# Altium PCB pcb_LAB_GNDpour.PcbDoc (part 2 of 2)
Units mil, origin at the board's own origin, x right, y up, seen from the top; angles counter-clockwise.
Board outline 6750 x 6451.58 mil, 2 copper layers (Top Layer, Bottom Layer); 127 components, 63 nets, 386 pads, 34 vias.
Unrouted connection lines stored in the file: 1.
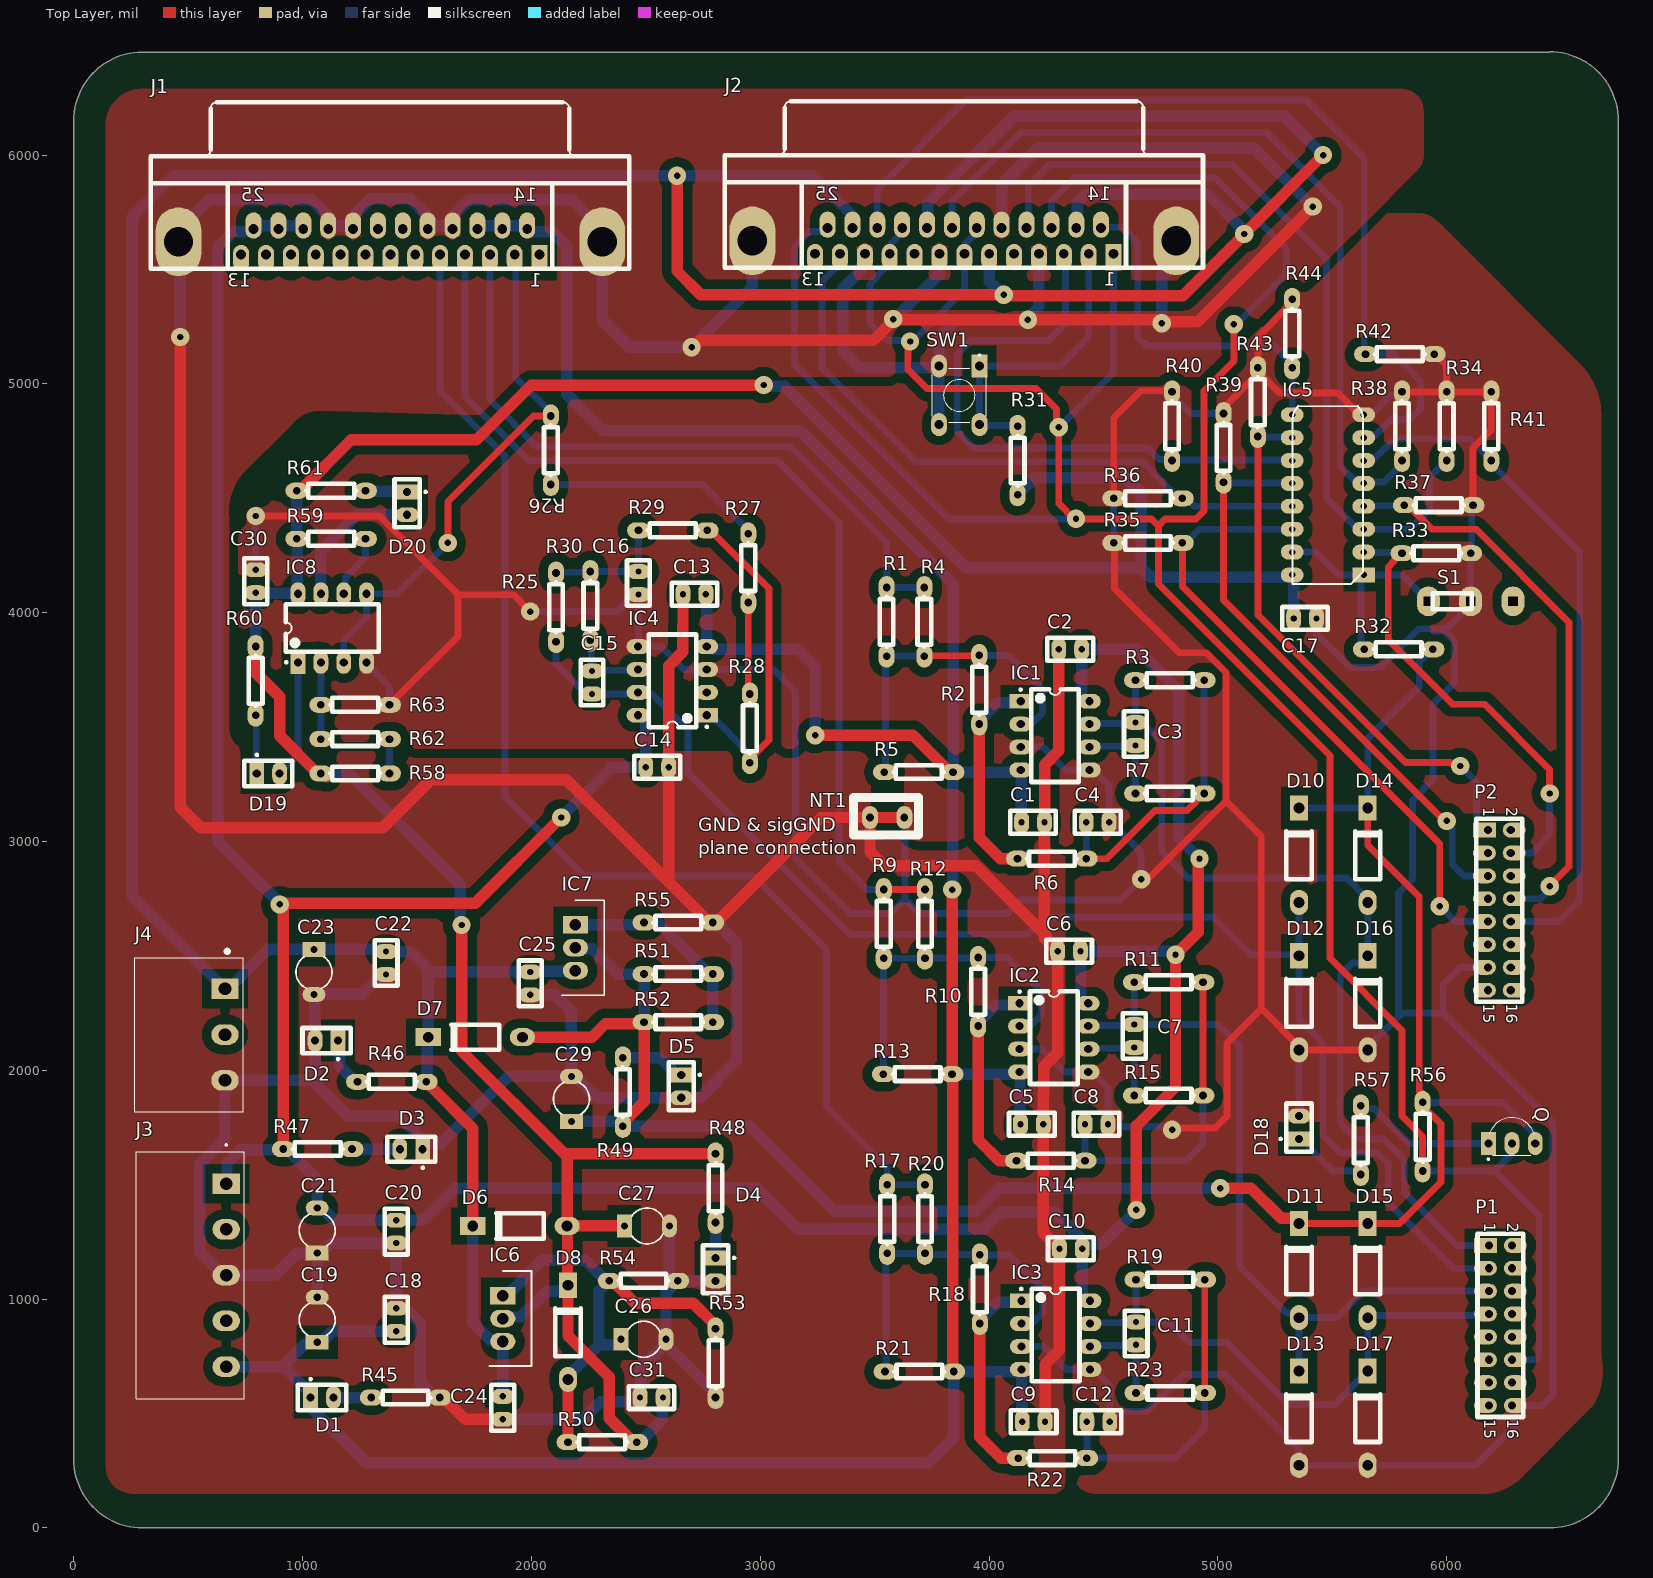
[diagram p0: Top Layer view]

## Silkscreen, mask and mechanical layers (free items; w line width, h text height) (continued)
Mechanical 13: (continued)
  lines w10: 6450,6450 300,6450 ccw(c300,6150) 0,6150 0,300 ccw(c300,300) 300,0 6450,0 ccw(c6450,300) 6750,300 6750,6151.57 ccw(c6450,6151.57) 6450,6451.57

## Text inside footprints (layer, text, board x,y; h text height)
J1: Top Overlay "25" at 835.14,5799.06 h59.06; Top Overlay "14" at 2025.93,5799.06 h59.06; Top Overlay "13" at 775.87,5425.04 h59.06; Top Overlay "1" at 2045.83,5425.04 h59.06
J2: Top Overlay "25" at 3343.56,5803.15 h59.06; Top Overlay "14" at 4534.35,5803.15 h59.06; Top Overlay "13" at 3284.29,5429.13 h59.06; Top Overlay "1" at 4554.25,5429.13 h59.06
P1: Top Overlay "2" at 6265,1335 h50 r270; Top Overlay "1" at 6165,1335 h50 r270; Top Overlay "15" at 6165,475 h50 r270; Top Overlay "16" at 6265,475 h50 r270
P2: Top Overlay "2" at 6260,3150 h50 r270; Top Overlay "1" at 6160,3150 h50 r270; Top Overlay "15" at 6160,2290 h50 r270; Top Overlay "16" at 6260,2290 h50 r270